# EAGLE board Teensy-Maxuino-Slave-A4988-stepper.b#10 (EAGLE 6.4)
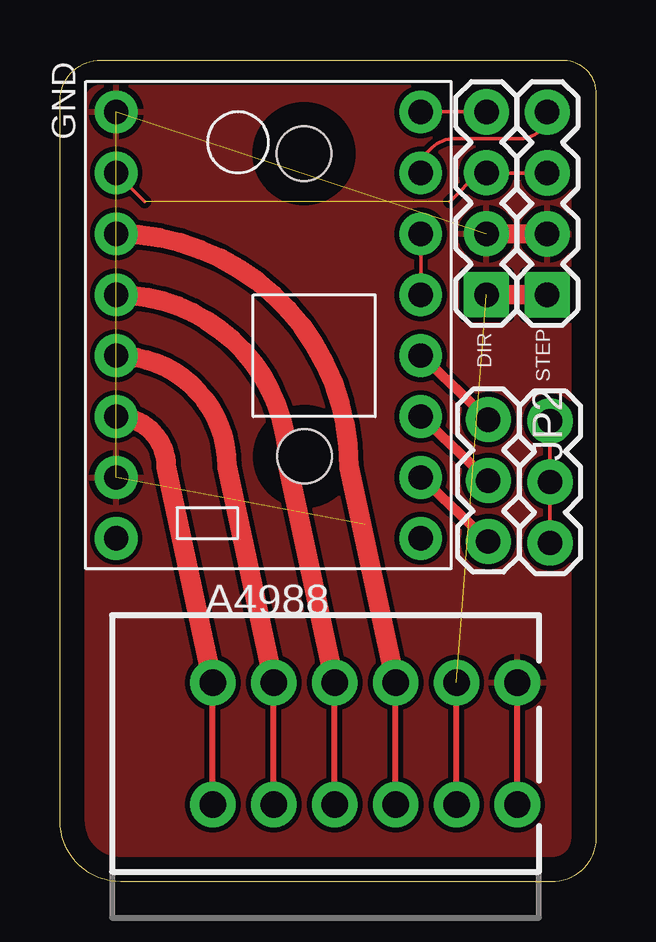
[diagram p0: board, top side]
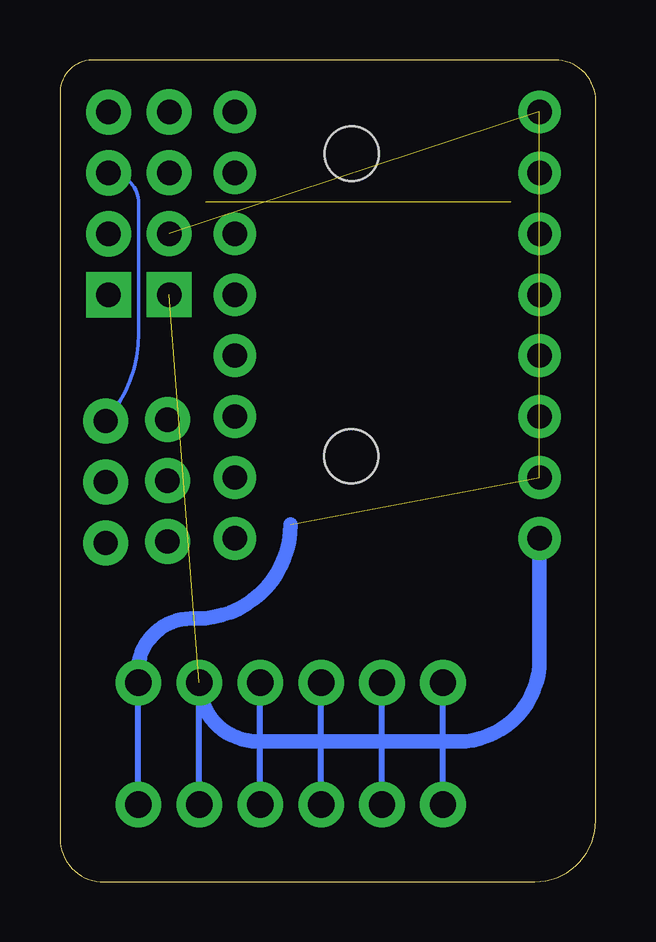
[diagram p1: board, bottom side, seen from below]

Size 22.34 x 34.27 mm. Coordinates in mm from the lower left corner, seen from the top.
Outline: 0,2.55 0,32.56 arc-90 1.71,34.27 20.9,34.27 arc-90 22.34,32.96 22.34,1.64 arc-90 20.32,0.01 2.54,0.01 arc-90 0,2.55
Copper layers (1*16): Top 0.035mm / dielectric 1.5mm / Bottom 0.035mm
Design rules "default *": minimum track width 6mil, minimum drill 24mil, track to track 8mil, track to pad 8mil, pad to pad 8mil, via to via 8mil, smd to smd 8mil, copper to edge 40mil, drill to drill 6mil, minimum pad ring 10mil, minimum via ring 8mil, stop-mask expansion 4mil, vias tented up to drill 0mil, thermal gap 10mil
Net classes: 0 default: width 0.152 mm, clearance 0.152 mm; 1 GND: width 0.406 mm, clearance 0.152 mm; 2 Power: width 0.406 mm, clearance 0.152 mm
Holes 2.26 mm at 10.18,30.36 10.2,17.74

## Footprints (pad centres in the part's own frame; a part is rotated, then mirrored left to right if it is on the bottom)
1X04 = drill 1.016 pad 1.88 square: 1 0,0 | drill 1.016 pad 1.88: 2 2.54,0; 3 5.08,0; 4 7.62,0
1X03 = drill 1.016 pad 1.88: 1 0,0; 2 2.54,0; 3 5.08,0
SPRINGTERMINAL-2.54MM-6 = drill 1.1 pad 1.9: 1 2.54,-2.54; 2 0,-2.54; 3 -2.54,-2.54; 4 -5.08,-2.54; 5 5.08,-2.54; 6 7.62,-2.54; P$1 2.54,2.54; P$2 0,2.54; P$3 -2.54,2.54; P$4 -5.08,2.54; P$5 5.08,2.54; P$6 7.62,2.54
POLOLU_A4988 = drill 1.016 pad 1.778: 1A 6.35,-1.27; 1B 6.35,-3.81; 2A 6.35,1.27; 2B 6.35,3.81; DIR -6.35,-8.89; EN -6.35,8.89; GND 6.35,-8.89; GND_MOT 6.35,6.35; MS1 -6.35,6.35; MS2 -6.35,3.81; MS3 -6.35,1.27; RST -6.35,-1.27; SLP -6.35,-3.81; STEP -6.35,-6.35; V_MOT 6.35,8.89; VDD 6.35,-6.35

## Placement (x,y rotation side)
DIR  [1X04]  17.79,24.48 90 top
JP2  [1X03]  17.86,19.27 270 top
JP3  [1X03]  20.44,14.13 90 top
JP4  [SPRINGTERMINAL-2.54MM-6]  11.45,5.77 0 top
STEP  [1X04]  20.32,24.48 90 top
U$1  POLOLU_A4988  [POLOLU_A4988]  8.69,23.21 180 top

## Library data of the parts
DIR JP2 JP3 STEP = SparkFun-Connectors
JP4 U$1 = aliEagleLib

## Nets
+5V: DIR.3 JP3.1 JP3.2 JP3.3 STEP.3 U$1.VDD
DIR: DIR.4 U$1.DIR
GND: DIR.2 JP4.P$6 STEP.2 U$1.GND U$1.GND_MOT
N$1: JP4.P$4 U$1.2B
N$2: JP4.P$3 U$1.2A
N$3: JP4.P$2 U$1.1A
N$4: JP4.P$1 U$1.1B
N$6: U$1.RST U$1.SLP
N$8: JP2.3 U$1.MS1
N$9: JP2.2 U$1.MS2
N$10: JP2.1 U$1.MS3
STEP: STEP.4 U$1.STEP
VIN [Power]: DIR.1 JP4.P$5 STEP.1 U$1.V_MOT

## Tracks (layer width: path | path; a pad name or v marks a point on that pad's centre or on a via)
+5V  (1 unrouted)
  Top 0.152: 16.26,28.37 17.45,29.56 DIR.3 arc90 DIR.3 STEP.3 | 3.54,28.37 U$1.VDD | JP3.1 JP3.2 JP3.3
  Bottom 0.152: STEP.3 arc90 19.06,28.3 19.06,22.88 arc41 JP3.3
DIR
  Top 0.152: DIR.4 arc90 DIR.4 U$1.DIR
GND  (3 unrouted)
  Top 0.813: STEP.2 DIR.2
  Bottom 0.61: JP4.P$6 19.07,8.79 arc90 16.89,10.98 16.65,10.98 arc-90 12.72,14.91
  pour Top: 0.66,3.28 arc90 4.01,0.6 20.05,0.6 arc90 21.93,1.85 21.9,32.58 arc90 19.9,33.81 0.72,33.84
N$1
  Top 0.813: U$1.2B arc-90 4.43,17.32 JP4.P$4
N$2
  Top 0.813: U$1.2A arc-90 6.97,17.32 JP4.P$3
N$3
  Top 0.813: U$1.1A arc-90 9.51,17.32 JP4.P$2
N$4
  Top 0.813: U$1.1B arc-90 12.05,17.32 JP4.P$1
N$6
  Top 0.152: U$1.SLP U$1.RST
N$8
  Top 0.406: U$1.MS1 JP2.3
N$9
  Top 0.406: U$1.MS2 JP2.2
N$10
  Top 0.406: U$1.MS3 JP2.1
STEP
  Top 0.152: STEP.4 arc-90 19.21,30.99 16.47,30.99 arc90 U$1.STEP
VIN  (1 unrouted)
  Top 0.813: STEP.1 DIR.1
  Bottom 0.61: U$1.V_MOT 2.35,9.25 arc90 5.74,5.85 14.07,5.85 arc90 JP4.P$5